# EAGLE board MJ818 clone - all driver - POC (EAGLE 9.4.0)
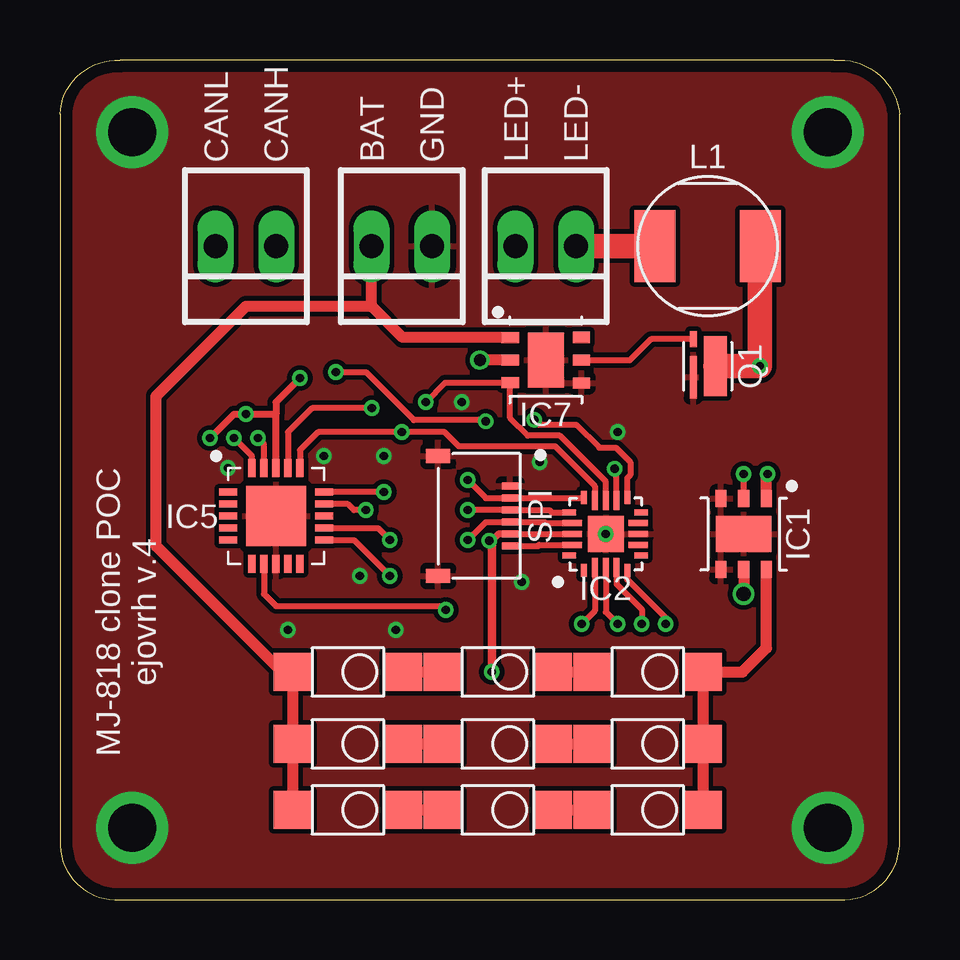
[diagram p0: board, top side]
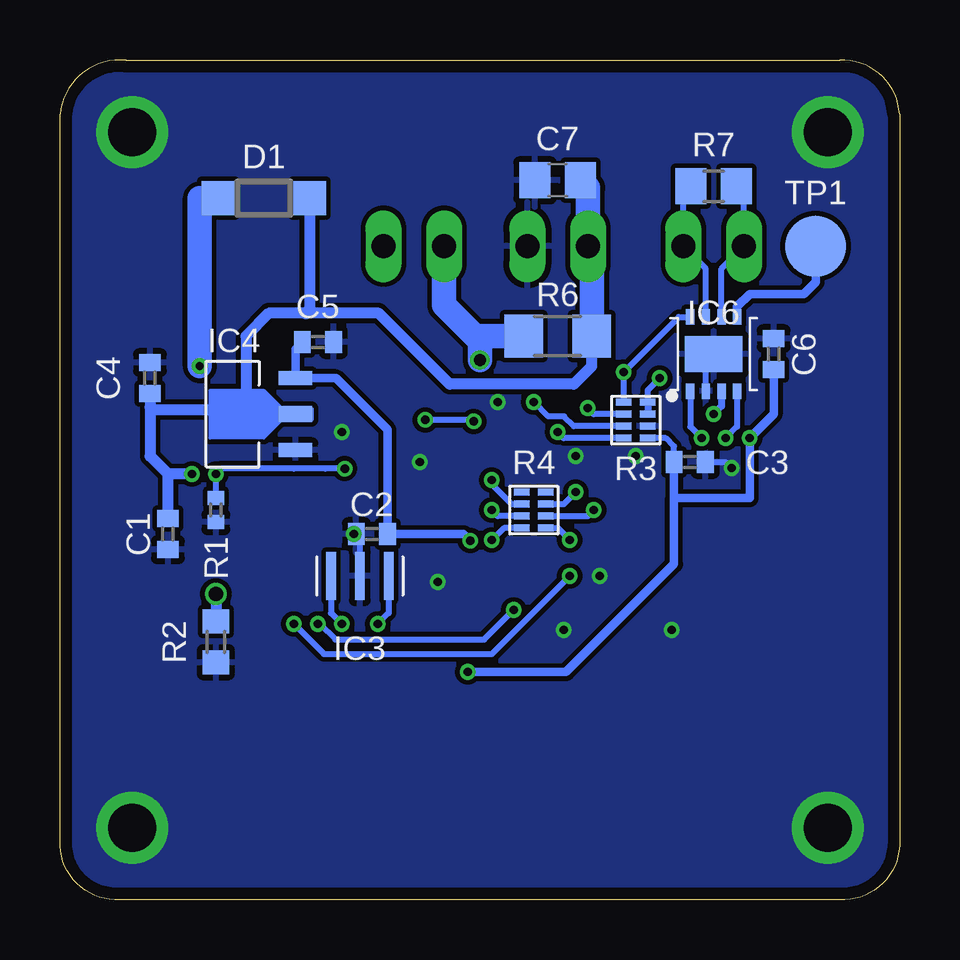
[diagram p1: board, bottom side, seen from below]

Size 35 x 35.01 mm. Coordinates in mm from the lower left corner, seen from the top.
Outline: 2.5,0 32.5,0
Outline: 35,2.25 35,32.75
Outline: 32.25,35 2.5,35 arc90 0,32.75 0,2.25
Outline: 32.25,35 arc-90 35,32.75
Outline: 32.5,0 arc90 35,2.25
Outline: 0,2.25 arc90 2.5,0
Outline: 32.25,35 arc-90 35,32.75
Outline: 32.5,0 arc90 35,2.25
Outline: 0,2.25 arc90 2.5,0
Copper layers (1*16): Top 0.035mm / dielectric 1.5mm / Bottom 0.035mm
Design rules "markovac_2layer": minimum track width 0.2mm, minimum drill 0.35mm, track to track 0.2mm, track to pad 0.2mm, pad to pad 0.2mm, via to via 0.2mm, smd to smd 0.2mm, copper to edge 0.5mm, drill to drill 8mil, minimum pad ring 0.15mm, minimum via ring 0.15mm, stop-mask expansion 4mil, vias tented up to drill 0.34mm, thermal gap 10mil
Net classes: 0 GND: width 0.254 mm, drill 0.254 mm, clearance 0.127 mm; 1 VCC: width 0.254 mm, drill 0.254 mm, clearance 0.127 mm; 2 signal: width 0.127 mm, drill 0.254 mm, clearance 0.127 mm; 3 5V0CAN: width 0.3 mm, drill 0.35 mm, clearance 0.2 mm; 4 5V0_μC: width 0.25 mm, drill 0.25 mm, clearance 0.2 mm; 5 currett-0.45: width 0.45 mm, drill 0.35 mm, clearance 0.2 mm

## Footprints (pad centres in the part's own frame; a part is rotated, then mirrored left to right if it is on the bottom)
C0402 = smd 0.7 x 0.9: 1 -0.65,0; 2 0.65,0
C0805 = smd 1.3 x 1.5: 1 -0.95,0; 2 0.95,0
SOD123 = smd 1.4 x 1.4: A 1.9,0; C -1.9,0
TDFN-6-EP = smd 0.71 x 0.46: CS 1.48,0; DIM -1.48,0; FLTS -1.48,-0.94; GND1 1.48,-0.95; IN -1.48,0.94; SINK 1.48,0.95 | smd 1.5 x 2.3: GND 0,0
VQFN-20 = smd 0.55 x 0.25: 1 -1.52,0.9; 5 -1.52,-0.9; 11 1.52,-0.9; 15 1.52,0.9 | smd 0.8 x 0.25: 2 -1.4,0.45; 3 -1.4,0; 4 -1.4,-0.45; 12 1.4,-0.45; 13 1.4,0; 14 1.4,0.45 | smd 0.25 x 0.55: 6 -0.9,-1.48; 10 0.9,-1.48; 16 0.9,1.52; 20 -0.9,1.52 | smd 0.25 x 0.8: 7 -0.45,-1.35; 8 0,-1.35; 9 0.45,-1.35; 17 0.45,1.4; 18 0,1.4; 19 -0.45,1.4 | smd 1.5 x 1.5: GND 0,0
SMT = smd 0.4 x 2: GND 0,0; XTAL1 -1.2,0; XTAL2 1.2,0
SOT-89-D = smd 0.57 x 1.4: GND -1.5,0.685; VOUT 1.5,0.685 | smd 0.65 x 1.4: VIN 0,0.685
QFN20 = smd 0.3 x 0.75: !CS! 1,2; !RESET! 0.5,2; !RX0BF! 1,-2; !RX1BF! 0.5,-2; GND6 0,-2; OSC1 -0.5,-2; OSC2 -1,-2; RXCAN -1,2; TXCAN -0.5,2; VDD 0,2 | smd 0.75 x 0.3: !INT! 2,-1; !TX0RTS! -2,0.5; !TX1RTS! -2,0; !TX2RTS! -2,-1; CLKOUT -2,1; NC1 -2,-0.5; NC2 2,0; SCK 2,-0.5; SI 2,0.5; SO 2,1 | smd 2.5 x 2.5: GND 0,0
DFN10 = smd 0.35 x 0.65: CANH -0.325,1.55; CANL 0.325,1.55; RXD 0.975,-1.55; SPLIT 0.975,1.55; STBY -0.975,1.55; TXD -0.975,-1.55; VDD 0.325,-1.55; VSS -0.325,-1.55 | smd 2.4 x 1.5: GND 0,0
TDFN-6-EP' = smd 0.71 x 0.46: CSN -1.48,0; DIM -1.48,-0.94; DRV 1.48,0; GND1 1.48,-0.95; IN -1.48,0.94; VCC 1.48,0.95 | smd 1.5 x 2.3: GND 0,0
SMT' = smd 1.7 x 3: P$1 2.2,0; P$2 -2.2,0
SMD = smd 1.6 x 1.6: A -2.3,0; C 2.3,0
SC-70-6 = smd 0.95 x 2.5: D -0.326,-0.004 | smd 0.3 x 0.65: G 0.597,-1.126 | smd 0.3 x 1.77: S 0.6,0.463
R0402 = smd 0.6 x 0.7: 1 -0.5,0; 2 0.5,0
R0603 = smd 1 x 1.1: 1 -0.85,0; 2 0.85,0
0402 = smd 0.65 x 0.3: 1 -0.5,-0.75; 2 0.5,-0.75; 3 -0.5,-0.25; 4 0.5,-0.25; 5 -0.5,0.25; 6 0.5,0.25; 7 -0.5,0.75; 8 0.5,0.75
R1206 = smd 1.6 x 1.803: 1 -1.422,0; 2 1.422,0
R0805 = smd 1.3 x 1.5: 1 -0.95,0; 2 0.95,0
SMT'' = smd 0.3 x 0.7: 1 -1.25,1.27; 2 -0.75,1.27; 3 -0.25,1.27; 4 0.25,1.27; 5 0.75,1.27; 6 1.25,1.27 | smd 0.6 x 1: GND1 -2.5,-1.73; GND2 2.5,-1.73
B2,54 = smd 2.54 x 2.54: TP 0,0
22-23-2021 = drill 1 long: 1 -1.27,0; 2 1.27,0

## Placement (x,y rotation side)
C1  1μF  [C0402]  30.5,15.25 90 bottom
C2  0.1μF  [C0402]  22,15.25 180 bottom
C3  0.1μF  [C0402]  8.75,18.25 0 bottom
C4  1μF  [C0402]  31.25,21.75 90 bottom
C5  1μF  [C0402]  24.25,23.25 180 bottom
C6  0.1μF  [C0402]  5.25,22.75 90 bottom
C7  47μF  [C0805]  14.25,30 180 bottom
D1  PMEG2010ER,115  [SOD123]  26.5,29.25 180 bottom
IC1  MAX16839  [TDFN-6-EP]  28.5,15.25 270 top
IC2  ATTINY4313-MMH  [VQFN-20]  22.75,15.25 90 top
IC3  PRQV8.00CR1510Y00L  [SMT]  22.5,13.5 0 bottom
IC4  LDK320ADU50R  [SOT-89-D]  24.5,20.25 90 bottom
IC5  MCP2515  [QFN20]  9,16 0 top
IC6  MCP2561-2  [DFN10]  7.75,22.75 0 bottom
IC7  MAX16820  [TDFN-6-EP']  20.25,22.5 0 top
L1  SDE0604A-270M - 27uH  [SMT']  27,27.25 180 top
LED1  604-AM2520SURC03  [SMD]  12,9.5 0 top
LED2  604-AM2520SURC03  [SMD]  12,6.5 0 top
LED3  604-AM2520SURC03  [SMD]  12,3.75 0 top
LED4  604-AM2520SURC03  [SMD]  18.25,9.5 0 top
LED5  604-AM2520SURC03  [SMD]  18.25,6.5 0 top
LED6  604-AM2520SURC03  [SMD]  18.25,3.75 0 top
LED7  604-AM2520SURC03  [SMD]  24.5,9.5 0 top
LED8  604-AM2520SURC03  [SMD]  24.5,6.5 0 top
LED9  604-AM2520SURC03  [SMD]  24.5,3.75 0 top
Q1  SiA456DJ  [SC-70-6]  27,22.25 180 top
R1  10k  [R0402]  28.5,16.25 270 bottom
R2  10R/0.5W  [R0603]  28.5,10.75 270 bottom
R3  741X083103JP 10k  [0402]  11,20 180 bottom
R4  741X083331JP 330R  [0402]  15.25,16.25 0 bottom
R6  30R/0.5W  [R1206]  14.25,23.5 0 bottom
R7  120  [R0805]  7.75,29.75 180 bottom
SPI  5034800600  [SMT'']  17.5,16 270 top
TP1  TPB2,54  [B2,54]  3.5,27.25 0 bottom
X1  CAN  [22-23-2021]  7.75,27.25 180 top
X2  XPERED-L1-R250-00401  [22-23-2021]  20.25,27.25 180 top
X3  BAT  [22-23-2021]  14.25,27.25 180 top

## Library data of the parts
C1-C7 = rcl; SPICEPREFIX: C
D1 = diode
IC1 = MAX16839 LED Driver, constant current
IC2 = ATtiny4313 microcontroller; SPICEPREFIX: X
IC3 = PRQV8.00CR1510Y00L - 8MHz resonator
IC4 = LDO SOT-89
IC5 = MCP2515-I-ML - Standalonce CAN Controller with SPI Interface
IC6 = MCP2561-2 - High-Speed CAN Transceiver
IC7 = MAX16820 LED Driver, constant current
L1 = DE0604A-778075 - Inductor
LED1-LED9 = AM2520SURC03-31454 - Red SMD LED
Q1 = SIA456DJ-T1-GE3  N-Fet
R1 R2 R6 R7 = rcl; SPICEPREFIX: R
R3 R4 = 74x-1133528 Resistor Array
SPI = 5034800600 FPC Connector
TP1 = testpad
X1-X3 = con-molex; MF: MOLEX; MPN: 22-23-2021; OC_FARNELL: 1462926; OC_NEWARK: 25C3832

## Nets
1.4: LED1.C LED4.A
2.5: LED2.C LED5.A
3.6: LED3.C LED6.A
4.7: LED4.C LED7.A
5.8: LED5.C LED8.A
5V0 [5V0CAN]: C2.1 C3.1 C5.2 C6.1 IC2.18 IC4.VOUT IC5.VDD IC6.VDD R3.1 R3.3 R3.7 SPI.5
6.9: LED6.C LED9.A
BAT+ [currett-0.45]: C1.2 C4.1 C7.1 D1.C IC1.IN IC4.VIN IC7.IN LED1.A LED2.A LED3.A R6.2 X3.2
CANH [signal]: IC6.CANH R7.2 X1.1
CANL [signal]: IC6.CANL R7.1 X1.2
CLOCKOUT [signal]: IC2.4 IC5.OSC1
CS: IC1.CS R2.1
DEBUGWIRE/RESET [signal]: IC2.19 SPI.6
DIM_BRAKE [signal]: IC2.13 IC7.DIM R3.6
DIM_BRAKE_DRAIN: D1.A L1.P$2 Q1.D
DIM_BRAKE_GATE [signal]: IC7.DRV Q1.G
DIM_REAR [signal]: IC1.DIM IC2.12 R1.1
GND: C1.1 C2.2 C3.2 C4.2 C5.1 C6.2 C7.2 IC1.FLTS IC1.GND IC1.GND1 IC2.8 IC2.GND IC3.GND IC4.GND IC5.GND IC5.GND6 IC6.GND IC6.VSS IC7.GND IC7.GND1 Q1.S R1.2 R2.2 R3.5 SPI.1 SPI.GND1 SPI.GND2 X3.1
ICSP_DI/MISO [signal]: IC2.15 R4.5 SPI.2
ICSP_DO/MOSI [signal]: IC2.16 R4.3 SPI.3
ICSP_SCK [signal]: IC2.17 R4.1 SPI.4
INT [signal]: IC2.5 IC5.!INT!
LED_AN [currett-0.45]: IC7.CSN R6.1 X2.2
LED_CA: L1.P$1 X2.1
N$1: IC2.9
N$2: IC2.7
N$3: IC2.10
N$4: IC2.1
N$5: IC2.20
N$9: IC2.6
RESET [signal]: IC5.!RESET! R3.4
RXCAN [signal]: IC5.RXCAN IC6.RXD
SINK: IC1.SINK LED7.C LED8.C LED9.C
SPI_MISO [signal]: IC5.SO R4.6
SPI_MOSI [signal]: IC5.SI R4.4
SPI_SCK [signal]: IC5.SCK R4.2
SPI_SS [signal]: IC2.14 IC5.!CS! R3.8
SPLIT: IC6.SPLIT TP1.TP
STBY [signal]: IC2.11 IC6.STBY R3.2
TXCAN [signal]: IC5.TXCAN IC6.TXD
VCC: IC7.VCC
XTAL1 [signal]: IC2.3 IC3.XTAL1
XTAL2 [signal]: IC2.2 IC3.XTAL2

## Tracks (layer width: path | path; a pad name or v marks a point on that pad's centre or on a via)
1.4
  Top 0.45: LED1.C LED4.A
2.5
  Top 0.45: LED2.C LED5.A
3.6
  Top 0.45: LED3.C LED6.A
4.7
  Top 0.45: LED4.C LED7.A
5.8
  Top 0.45: LED5.C LED8.A
5V0  (via drill 0.35)
  Top 0.25: SPI.5 C2.1
  Top 0.3: 9,20.25 v7.75,20.25 7.25,20.25 v6.25,19.25 | IC5.VDD 9,20.25 | 9,20.25 9,20.75 v10,21.75 | SPI.5 18.27,15.25 18,14.98 v17.89,14.98
  Top 0.35: 18,14.98 v18,9.5
  Bottom 0.25: R3.1 10.5,21.25 v10,21.75 | C3.1 9.4,18.9 9.75,19.25 R3.7
  Bottom 0.3: IC6.VDD 7.42,20.58 v7.75,20.25 | R3.1 R3.3 | 21.42,15.32 C2.1
  Bottom 0.35: 9.4,16.75 6.25,16.75 v6.25,19.25 5.25,20.25 C6.1 | C3.1 9.4,16.75 | 9.4,16.75 9.4,14 13.9,9.5 v18,9.5 | v17.89,14.98 18.17,15.25 C2.1 21.35,19.6 23.5,21.75 IC4.VOUT 25.18,22.97 C5.2
6.9
  Top 0.45: LED6.C LED9.A
BAT+  (via drill 0.35)
  Top 0.45: 12.98,24.75 X3.2 | 12.98,24.75 14.29,23.44 IC7.IN | LED3.A LED2.A LED1.A 9.25,9.5 4,14.75 4,21 7.75,24.75 12.98,24.75 | IC1.IN 29.44,17.69 v29.5,17.75
  Bottom 0.45: R6.2 12.83,22.25 13.58,21.5 18.76,21.5 21.71,24.46 24.75,24.46 26.3,24.46 27.25,23.5 27.25,20.44 | D1.C 24.6,24.61 | 28.75,20.44 31.16,20.44 31.25,20.53 C4.1 31.25,18.5 30.5,17.75 | v29.5,17.75 30.5,17.75 | C1.2 30.5,17.75
  Bottom 0.508: 27.06,20.25 27.25,20.44 28.75,20.44 28.56,20.25 IC4.VIN | 24.6,24.61 24.75,24.46
  Bottom 1.016: C7.1 12.98,29.68 X3.2 12.83,27.1 R6.2
CANH
  Bottom 0.25: R7.2 9.02,29.75 X1.1 8.07,26.31 IC6.CANH
CANL
  Bottom 0.25: R7.1 6.48,29.75 X1.2 7.42,26.31 IC6.CANL
CLOCKOUT  (via drill 0.35)
  Top 0.25: IC2.4 23.2,13.17 24.25,12.12 v24.25,11.5 | v16.09,12.09 15.92,12.25 9,12.25 8.5,12.75 IC5.OSC1
  Bottom 0.25: v24.25,11.5 24.17,11.5 23.52,10.85 17.32,10.85 v16.09,12.09
CS  (via drill 0.6)
  Top 0.45: IC1.CS v28.5,12.75
  Bottom 0.45: v28.5,12.75 R2.1
DEBUGWIRE/RESET
  Top 0.25: SPI.6 19.93,14.75 19.98,14.8 IC2.19
DIM_BRAKE  (via drill 0.35)
  Top 0.25: IC2.13 22.75,17.44 20.84,19.35 20.84,19.36 19.5,19.36 18.77,20.09 IC7.DIM 16.06,21.56 v15.25,20.75
  Bottom 0.25: R3.6 13.58,19.75 13.98,20.15 14.65,20.15 v15.25,20.75
DIM_BRAKE_DRAIN  (via drill 0.35)
  Top 1.016: L1.P$2 29.18,27.23 v29.18,22.25 Q1.D
  Bottom 0.3: 29.18,29.25 D1.A
  Bottom 1.016: v29.18,22.25 29.18,29.25
DIM_BRAKE_GATE
  Top 0.25: Q1.G 24.63,23.38 23.75,22.5 IC7.DRV
DIM_REAR  (via drill 0.35)
  Top 0.25: IC2.12 23.2,17.91 v23.13,17.98 | IC1.DIM v28.5,17.75
  Bottom 0.25: R1.1 v28.5,17.75 28.27,17.98 25.24,17.98 25.24,17.97 23.94,17.97 23.94,17.98 v23.13,17.98
GND  (via drill 0.35, 2)
  Bottom 0.25: IC3.GND 22.5,15.1 C2.2 | IC6.VSS 8.07,22.43 IC6.GND | C3.2 7.25,18.25 v7,18
  other vias: 3,32 3,3 32,3 32,32 19.25,13.25 20,18.25 12.5,13.5 13.5,18.5 22.75,15.25 14,11.25 11,18.5 9.5,11.25 23.25,19.5 16.75,20.75
  pour Top: 0,35 35,35 35,0 0,0
  pour Bottom: 0,35 0,0 35,0 35,35
ICSP_DI/MISO  (via drill 0.35)
  Top 0.25: IC2.15 21.83,16.75 SPI.2 17.75,16.75 v17,17.5
  Bottom 0.25: R4.5 16.18,16.5 17,17.32 v17,17.5
ICSP_DO/MOSI  (via drill 0.35)
  Top 0.25: IC2.16 20.5,16.15 20.4,16.25 SPI.3 v17,16.25
  Bottom 0.25: R4.3 16.75,16 v17,16.25
ICSP_SCK  (via drill 0.35)
  Top 0.25: IC2.17 20.25,15.7 20.2,15.75 SPI.4 17.75,15.75 v17,15
  Bottom 0.25: R4.1 16.5,15.5 v17,15
INT  (via drill 0.35)
  Top 0.25: IC5.!INT! 12.25,15 v13.75,13.5 | IC2.5 23.65,13.35 25.25,11.75 v25.25,11.5
  Bottom 0.25: v13.75,13.5 17,10.25 24,10.25 v25.25,11.5
LED_AN  (via drill 0.5)
  Top 0.45: IC7.CSN v17.5,22.5
  Bottom 0.5: v17.5,22.5 17.25,22.75 17.25,23.5
  Bottom 1.016: R6.1 17.25,23.5 17.69,23.5 | X2.2 18.98,24.79 17.69,23.5 | v17.5,22.5 17.5,23.31 17.69,23.5
LED_CA
  Top 1.016: L1.P$1 X2.1
RESET  (via drill 0.35)
  Top 0.25: IC5.!RESET! 9.5,19.5 10.5,20.5 v13,20.5
  Bottom 0.25: R3.4 12.75,20.25 v13,20.5
RXCAN  (via drill 0.35)
  Top 0.25: IC5.RXCAN 8,18.5 v7.25,19.25
  Bottom 0.25: IC6.RXD 6.78,19.73 v7.25,19.25
SINK
  Top 0.45: LED9.C LED8.C LED7.C 28.45,9.5 29.45,10.5 IC1.SINK
SPI_MISO  (via drill 0.35)
  Top 0.25: v13.5,17 IC5.SO
  Bottom 0.25: R4.6 14,16.5 v13.5,17
SPI_MOSI  (via drill 0.35)
  Top 0.25: v12.75,16.25 12.25,16.25 12,16.5 IC5.SI
  Bottom 0.25: R4.4 13,16 v12.75,16.25
SPI_SCK  (via drill 0.35)
  Top 0.25: IC5.SCK 13.25,15.5 v13.75,15
  Bottom 0.25: R4.2 14.25,15.5 v13.75,15
SPI_SS  (via drill 0.35)
  Top 0.25: IC5.!CS! 10,18.75 10.75,19.5 v14.25,19.5 16.03,19.5 16.63,18.9 20.65,18.9 22.3,17.25 IC2.14
  Bottom 0.25: R3.8 14,19.25 v14.25,19.5
SPLIT
  Bottom 0.35: IC6.SPLIT 6.78,24.73 6.25,25.25 4,25.25 3.5,25.75 TP1.TP
STBY  (via drill 0.35)
  Top 0.25: v19.77,20.01 19.97,19.81 21.52,19.81 22.48,18.85 23.18,18.85 23.78,18.25 23.78,17.71 23.65,17.58 IC2.11 | v11.5,22 12.75,22 14.75,20 17.69,20 v17.75,19.94
  Bottom 0.25: 17.82,20.01 v19.77,20.01 | R3.2 v11.5,22 9.2,24.3 IC6.STBY
  Bottom 0.254: v17.75,19.94 17.82,20.01
TXCAN  (via drill 0.35)
  Top 0.25: IC5.TXCAN 8.5,19 v8.25,19.25
  Bottom 0.25: IC6.TXD 8.72,19.73 v8.25,19.25
XTAL1  (via drill 0.35)
  Top 0.25: IC2.3 22.75,12 v23.25,11.5
  Bottom 0.25: IC3.XTAL1 23.7,11.95 v23.25,11.5
XTAL2  (via drill 0.35)
  Top 0.25: IC2.2 22.3,12.05 v21.75,11.5
  Bottom 0.25: IC3.XTAL2 21.3,11.95 v21.75,11.5

## Text on the board
tPlace: BAT | GND | LED+ | LED- | MJ-818 clone POC / ejovrh v.4
tNames: CANL | CANH